# Altium PCB My_STM32_BOARD_PCB.PcbDoc
Units mil, origin at the board's own origin, x right, y up, seen from the top; angles counter-clockwise.
Board outline 4553.06 x 2760.98 mil, 2 copper layers (Top Layer, Bottom Layer); 71 components, 127 nets, 537 pads, 119 vias.
Unrouted connection lines stored in the file: 76.
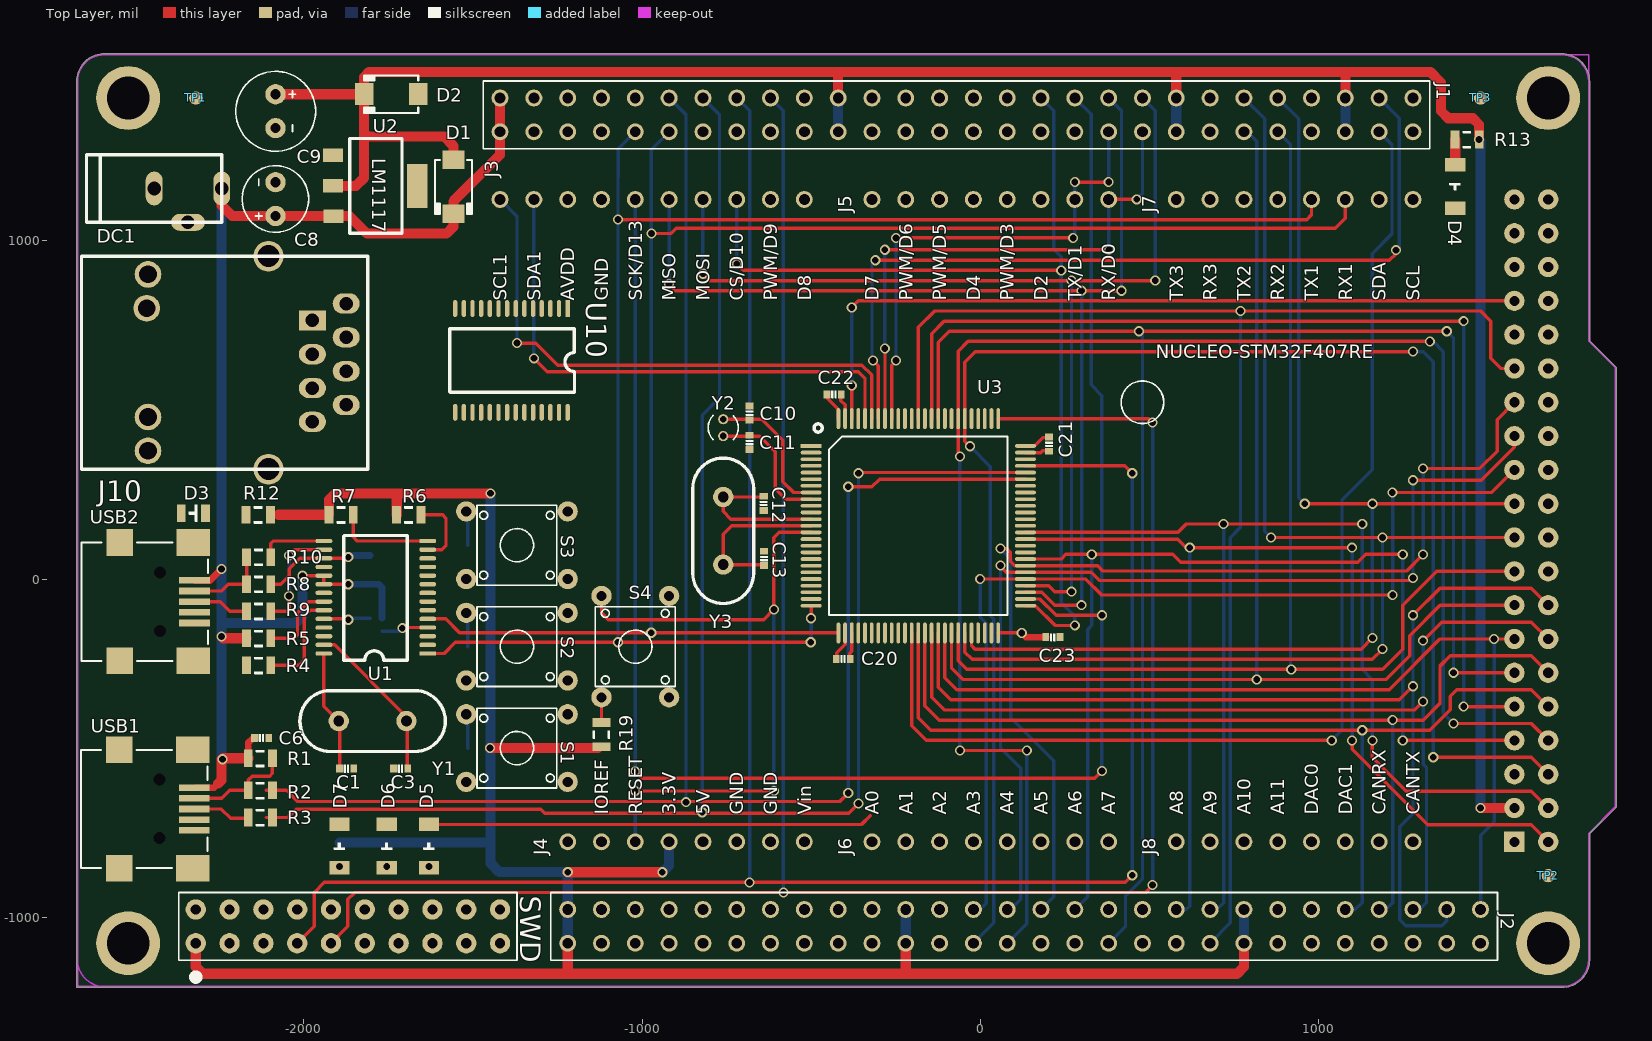
[diagram p0: Top Layer view]
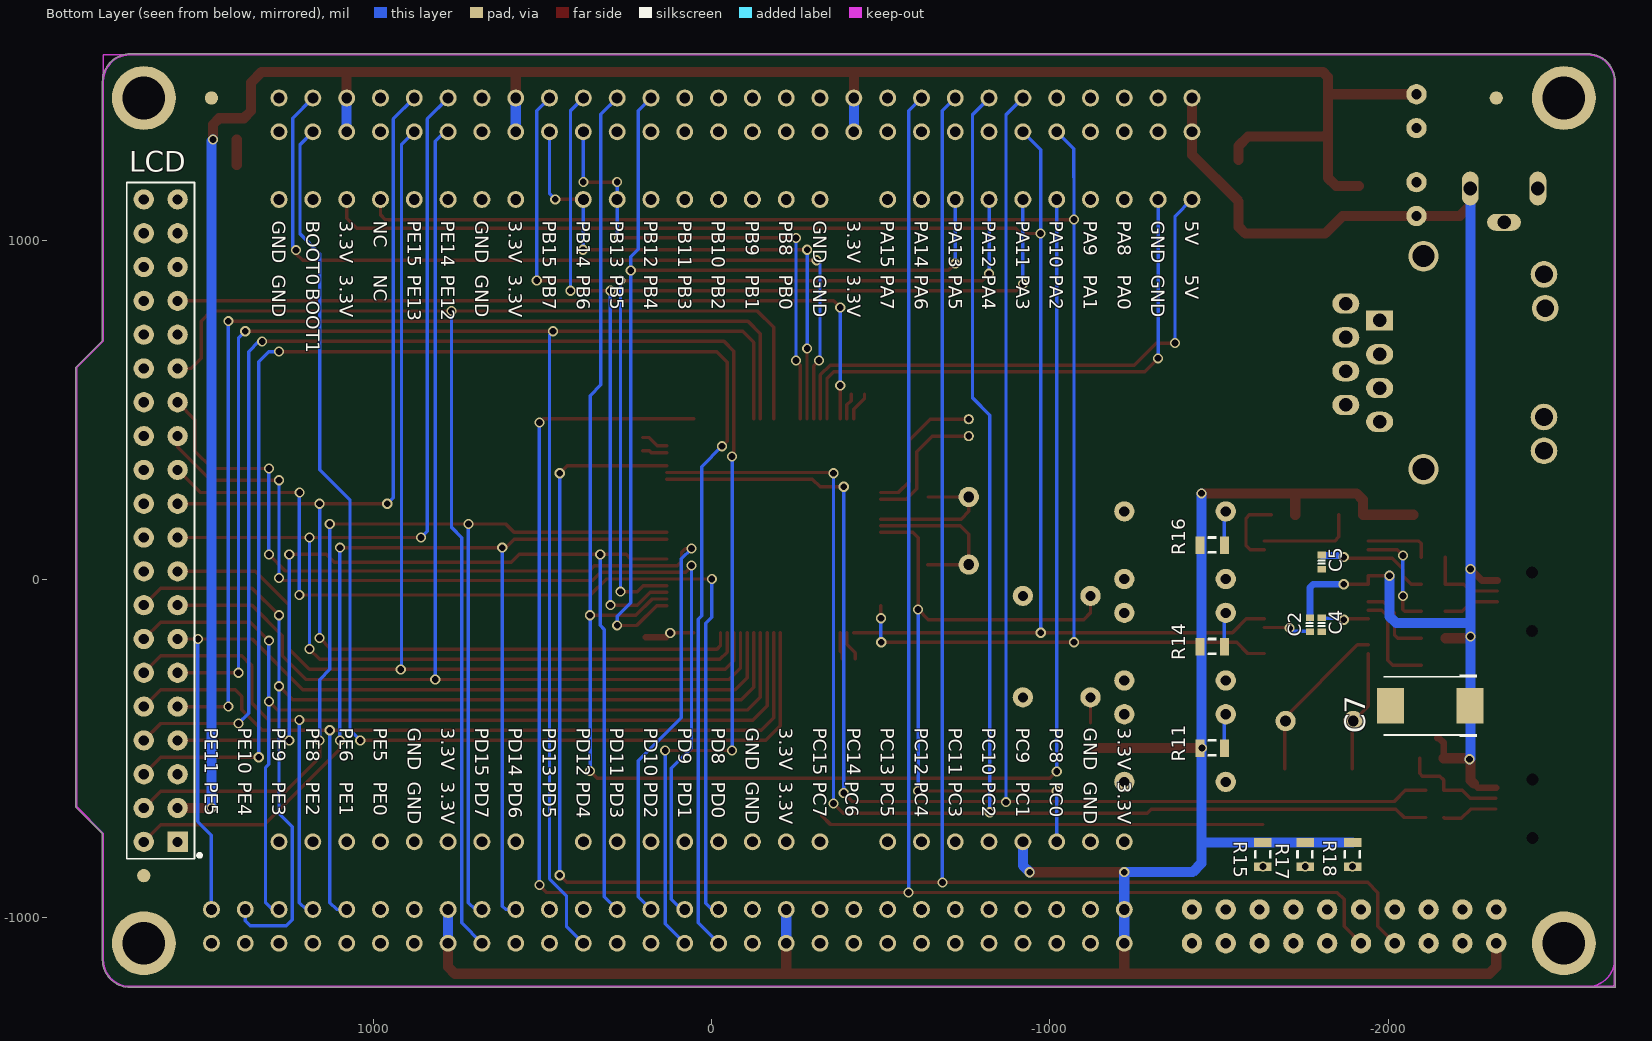
[diagram p1: Bottom Layer view, seen from below]
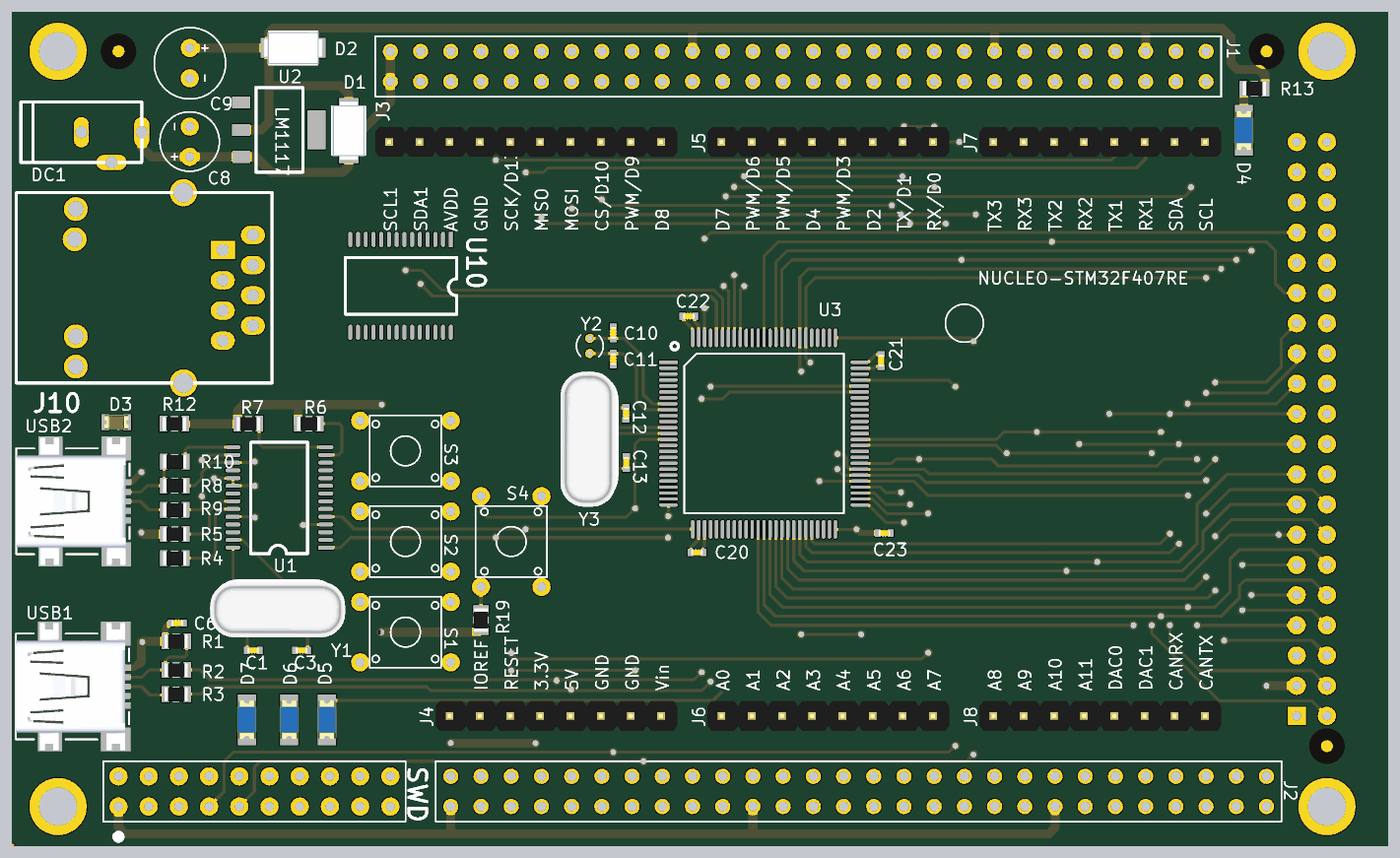
[diagram p2: 3D render of the assembled board from above, using the file's embedded part models]
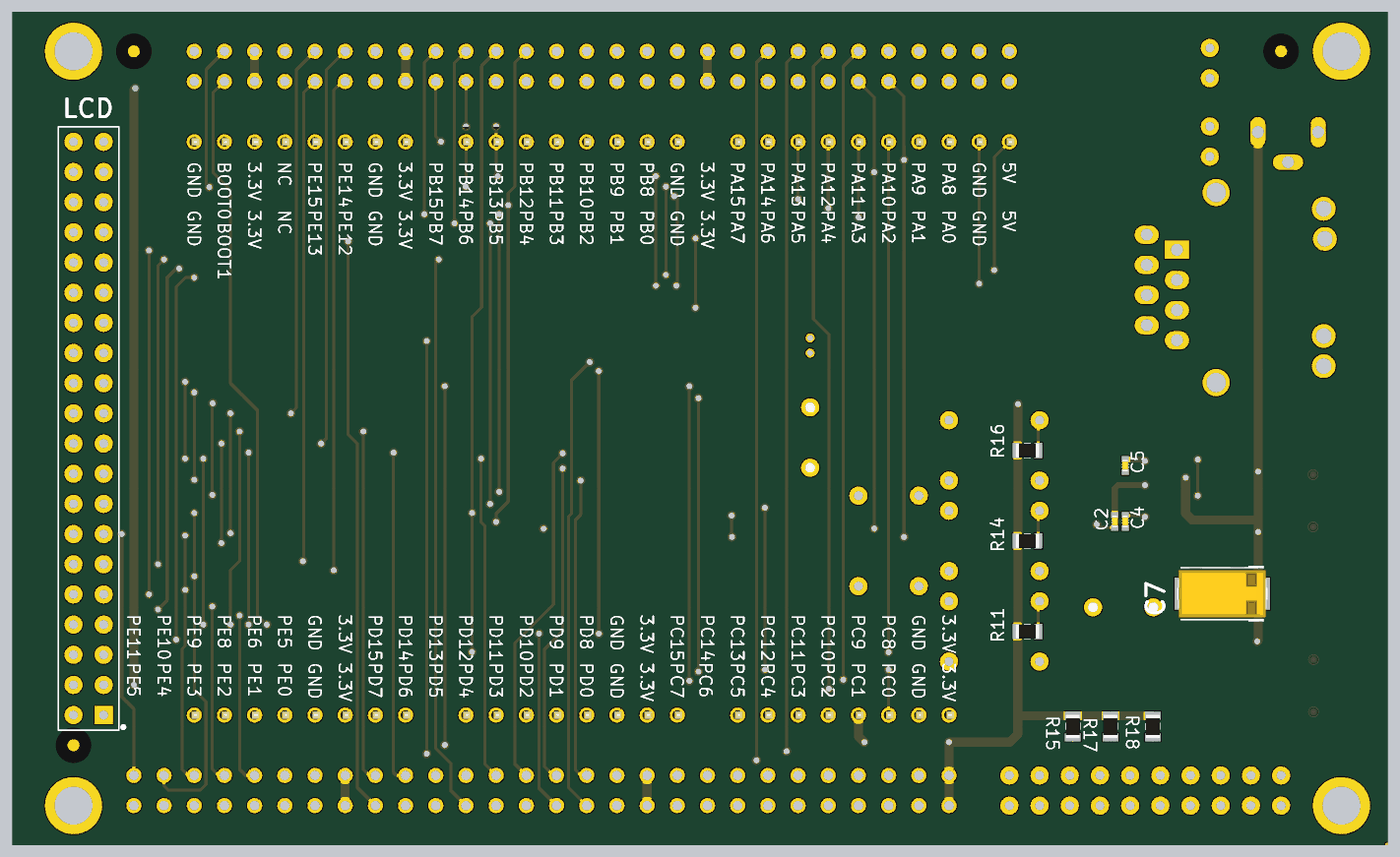
[diagram p3: 3D render of the assembled board from below, using the file's embedded part models]

## Layer stack, top to bottom
Top Layer: signal copper 1.4
Dielectric: dielectric 12.6, FR-4, Dk 4.8
Bottom Layer: signal copper 1.4

## Board outline
-2669.57,-1207.77 cw(c-2669.61,-1205.25) -2672.12,-1205.25 -2672.12,1471.91 cw(c-2590.87,1471.91) -2590.87,1553.17 cw(c-2590.87,1550.65) -2590.84,1553.17 -1665,1553.22 cw(c-1665,1550.7) -1664.52,1553.17 1720.94,1553.17 cw(c1720.94,1471.91) 1802.2,1471.91 cw(c1799.69,1471.91) 1802.2,1471.88 1802.2,705.24 1880.2,627.23 cw(c1878.43,625.46) 1880.94,625.46 1880.94,-673.76 cw(c1878.43,-673.76) 1880.2,-675.54 1802.2,-753.54 1802.2,-1126.51 cw(c1720.94,-1126.51) 1720.94,-1207.77 -2590.99,-1207.77 ccw(c-2590.87,-1126.51) -2590.87,-1207.77 ccw(c-2590.87,-1205.25)

## Design rules (kind name [scope] priority, off if disabled: settings)
Clearance [All] p1: gap=8
PolygonConnect [All] p1: connectstyle=Relief reliefconductorwidth=10 reliefentries=4 polygonreliefangle="90 Angle"
RoutingVias [All] p1: holewidth=28 width=50 viastyle="Through Hole" minholewidth=28 minwidth=50 maxholewidth=28 maxwidth=50
SilkscreenOverComponentPads [All] p1: minsilkscreentomaskgap=10
SolderMaskExpansion [All] p1: expansion=4
Width [All] p1: maxlimit=30 minlimit=10 preferedwidth=30 minimp=50.000000 maximp=50.000000 favimp=50.000000
27 further rules are at their usual default settings.

## Classes and differential pairs
component class U_My_STM32_BOARD_FUNCTION_SCH: * C1 C2 C3 C4 C5 C6 C7 C8 C9 COM? D1 D2 D3 D4 D5 D6 D7 DC1 J10 R1 R2 R3 R4 R5 R6 R7 R8 R9 R10 R11 R12 R13 R14 R15 R16 R17 R18 R19 S1 S2 S3 S4 TP1 TP2 TP3 U1 U2 U10 USB1 USB2 Y1
component class U_My_STM32_BOARD_ARDUINO_SCH: J3 J4 J5 J6 J7 J8
component class U_My_STM32_BOARD_MCU_SCH: C10 C11 C12 C13 C20 C21 C22 C23 U3 Y2 Y3
component class U_My_STM32_BOARD_HEADER_SCH: J1 J2 LCD SWD

## Components (designator, comment, footprint, x,y, rotation, side; value= is the part's Value field where it differs from the comment)
C1 "Cap_0402" CAP_0402 -1874,-560.3 r0 top
C2 "Cap_0402" CAP_0402 -1769,-135.3 r90 bottom
C3 "Cap_0402" CAP_0402 -1714,-560.3 r180 top
C4 "Cap_0402" CAP_0402 -1804,-135.3 r270 bottom
C5 "Cap_0402" CAP_0402 -1804,49.7 r270 bottom
C6 "Cap_0402" CAP_0402 -2125,-470 r180 top
C7 "Cap_Tan_2917" CAP_TAN_D2917 -2125,-375 r0 bottom
C8 "Cap_Pol" Cap_Pol_F5 -2084,1073.7 r90 top (schematic designator C12)
C9 "Cap_Pol" Cap_Pol_F6 -2084,1433.7 r270 top (schematic designator C11)
C10 "Cap_0402" CAP_0402 -682,491 r270 top
C11 "Cap_0402" CAP_0402 -682,404 r90 top
C12 "Cap_0402" CAP_0402 -640,224 r90 top
C13 "Cap_0402" CAP_0402 -639,61 r270 top
C20 "Cap_0402" CAP_0402 -405,-236 r0 top
C21 "Cap_0402" CAP_0402 204,399 r90 top
C22 "Cap_0402" CAP_0402 -432,546 r180 top
C23 "Cap_0402" CAP_0402 215,-172 r180 top
D1 "" DIODE_DO-214AC -1558,1160 r270 top
D2 "" DIODE_DO-214AC -1742,1434 r180 top
D3 "LED_0805" LED_0805_RED -2327,195 r180 top
D4 "LED_0805" LED_1206_BLUE 1405,1161 r270 top
D5 "LED_0805" LED_1206_BLUE -1630,-790 r90 top
D6 "LED_0805" LED_1206_BLUE -1755,-790 r90 top
D7 "LED_0805" LED_1206_BLUE -1895,-790 r90 top
DC1 "DC5.0V" DC_5V -2243,1155 r180 top
J1 "HDR2X28_2.54" HDR2X28_2.54 1280,1422.7 r270 top
J2 "HDR2X28_2.54" HDR2X28_2.54 1480,-977.3 r270 top
J3 "HDR1X10_2.54" HDR1X10_2.54_180 -1420,1122.7 r90 top
J4 "HDR1X8_2.54" HDR1X8_2.54_180 -1220,-777.3 r90 top (schematic designator J5)
J5 "HDR1X8_2.54" HDR1X8_2.54_180 -320,1122.7 r90 top (schematic designator J6)
J6 "HDR1X8_2.54" HDR1X8_2.54_180 -320,-777.3 r90 top (schematic designator J4)
J7 "HDR1X8_2.54" HDR1X8_2.54_180 580,1122.7 r90 top
J8 "HDR1X8_2.54" HDR1X8_2.54_180 580,-777.3 r90 top
J10 "HR9111105A" RJ45-HR9111105A -2225,640 r180 top
LCD "LCD_ILI9325" ILI9325 1580,-777.3 r90 bottom
R1 "Res_0805" RES_0805 -2129,-530.3 r180 top
R2 "Res_0805" RES_0805 -2129,-625.3 r0 top
R3 "Res_0805" RES_0805 -2129,-705.3 r0 top
R4 "Res_0805" RES_0805 -2134,-255.3 r180 top
R5 "Res_0805" RES_0805 -2134,-175.3 r180 top
R6 "Res_0805" RES_0805 -1690,190 r0 top
R7 "Res_0805" RES_0805 -1890,190 r0 top
R8 "Res_0805" RES_0805 -2134,-15.3 r180 top
R9 "Res_0805" RES_0805 -2134,-95.3 r180 top
R10 "Res_0805" RES_0805 -2134,64.7 r180 top
R11 "Res_0805" RES_0805 -1480,-500 r180 bottom
R12 "Res_0805" RES_0805 -2135,190 r180 top
R13 "Res_0805" RES_0805 1440,1300 r180 top
R14 "Res_0805" RES_0805 -1480,-200 r180 bottom
R15 "Res_0805" RES_0805 -1630,-815 r270 bottom
R16 "Res_0805" RES_0805 -1480,100 r180 bottom
R17 "Res_0805" RES_0805 -1755,-815 r270 bottom
R18 "Res_0805" RES_0805 -1895,-815 r270 bottom
R19 "Res_0805" RES_0805 -1120,-460 r90 top
S1 "Button" My_Button -1370,-500 r0 top
S2 "Button" My_Button -1370,-200 r0 top (schematic designator S3)
S3 "Button" My_Button -1370,100 r0 top (schematic designator S4)
S4 "Button" My_Button -1020,-200 r90 top (schematic designator S2)
SWD "PH_CN20" CN20 -2320,-1077.3 r90 top
TP1 "TP" MARK -2320,1422.7 r0 top
TP2 "TP" MARK 1680,-877.3 r0 top
TP3 "TP" MARK 1480,1422.7 r0 top
U1 "Com_PL2303" SSOP-28 -1634,-220.3 r180 top
U2 "LM317" lm1117 -1790,1173 r270 top
U3 "STM32FXXXV" LQFP-100 -170,152.7 r0 top
U10 "NET-ENC28J60" SSOP-28 -1220,800 r270 top
USB1 "USB_Mini" USB_MINI-B -2325,-680 r90 top
USB2 "USB_Mini" USB_MINI-B -2323.61,-67.03 r90 top
Y1 "XTAL" XT_HC49S_D -1797,-420 r180 top
Y2 "XTAL" XT_XTAL_32K -760,422.7 r90 top
Y3 "XTAL" XT_HC49S_D -760,142.7 r90 top

## Footprints (in the part's own frame and the unit in brackets; to place one, negate y for a bottom-side part, rotate by r counter-clockwise, add the part's x,y. Pads: shape width x height; smd on the part's side, far side on the other; paste and mask are expansions set on the pad)
CAP_0402 [mil]
  rect 20x24 smd: 1(-21,0) 2(21,0)
  silkscreen extent -6,-10 6,10, body extent -20,-10 20,10, height 22
Cap_Pol_F5 [mil] "Cap F5"
  round 60 hole 30: 1(0,0) 2(100,0)
  silkscreen extent -48,-98 149,99
Cap_Pol_F6 [mil] "Cap F5"
  round 60 hole 30: 1(0,0) 2(100,0)
  silkscreen extent -68,-118 168,119
CAP_TAN_D2917 [mil]
  rect 80x106 smd: 1(-118,0) 2(118,0)
  silkscreen extent -138,-92 138,92, body extent -150,-78 150,78, height 122
CN20 [mil] "Header 10 X 2"
  round 60 hole 30: 1(0,0) 2(100,0) 3(0,-100) 4(100,-100) 5(0,-200) 6(100,-200) 7(0,-300) 8(100,-300) 9(0,-400) 10(100,-400) 11(0,-500) 12(100,-500) 13(0,-600) 14(100,-600) 15(0,-700) 16(100,-700) 17(0,-800) 18(100,-800) 19(0,-900) 20(100,-900)
  silkscreen extent -110,-950 150,50
DC_5V [mil] "DC 5.0V"
  oval 50x100 hole 40: 1(0,0) 2(200,0)
  oval 100x50 hole 40: 3(100,100)
  silkscreen extent 0,-100 400,100
DIODE_DO-214AC [mil] "SMA"
  rect 55x65 smd: 1(-80,0) 2(80,0)
  silkscreen extent -80,-55 80,55, body extent -98,-53 98,53, height 85
HDR1X8_2.54_180 [mil]
  round 50 hole 32: 1(0,0) 2(0,-100) 3(0,-200) 4(0,-300) 5(0,-400) 6(0,-500) 7(0,-600) 8(0,-700)
  body extent -49,-750 49,50, height 323
HDR1X10_2.54_180 [mil]
  round 50 hole 32: 1(0,0) 2(0,-100) 3(0,-200) 4(0,-300) 5(0,-400) 6(0,-500) 7(0,-600) 8(0,-700) 9(0,-800) 10(0,-900)
  body extent -49,-950 49,50, height 323
HDR2X28_2.54 [mil]
  round 50 hole 32: 1(0,0) 2(100,0) 3(0,-100) 4(100,-100) 5(0,-200) 6(100,-200) 7(0,-300) 8(100,-300) 9(0,-400) 10(100,-400) 11(0,-500) 12(100,-500) 13(0,-600) 14(100,-600) 15(0,-700) 16(100,-700) 17(0,-800) 18(100,-800) 19(0,-900) 20(100,-900) 21(0,-1000) 22(100,-1000) 23(0,-1100) 24(100,-1100) 25(0,-1200) 26(100,-1200) 27(0,-1300) 28(100,-1300) 29(0,-1400) 30(100,-1400) 31(0,-1500) 32(100,-1500) 33(0,-1600) 34(100,-1600) 35(0,-1700) 36(100,-1700) 37(0,-1800) 38(100,-1800) 39(0,-1900) 40(100,-1900) 41(0,-2000) 42(100,-2000) 43(0,-2100) 44(100,-2100) 45(0,-2200) 46(100,-2200) 47(0,-2300) 48(100,-2300) 49(0,-2400) 50(100,-2400) 51(0,-2500) 52(100,-2500) 53(0,-2600) 54(100,-2600) 55(0,-2700) 56(100,-2700)
  silkscreen extent -50,-2750 150,50
ILI9325 [mil] "My  ILI9325 LCD module"
  rect 60x60 hole 30: 1(0,0)
  round 60 hole 30: 2(100,0) 3(200,0) 4(300,0) 5(400,0) 6(500,0) 7(600,0) 8(700,0) 9(800,0) 10(900,0) 11(1000,0) 12(1100,0) 13(1200,0) 14(1300,0) 15(1400,0) 16(1500,0) 17(1600,0) 18(1700,0) 19(1800,0) 20(1900,0) 21(0,100) 22(100,100) 23(200,100) 24(300,100) 25(400,100) 26(500,100) 27(600,100) 28(700,100) 29(800,100) 30(900,100) 31(1000,100) 32(1100,100) 33(1200,100) 34(1300,100) 35(1400,100) 36(1500,100) 37(1600,100) 38(1700,100) 39(1800,100) 40(1900,100)
  silkscreen extent -50,-70 1950,150
LED_0805_RED [mil]
  rect 26x52 smd: 1(-36,0) 2(36,0)
  silkscreen extent -12,-24 12,24, body extent -40,-25 40,25, height 43
LED_1206_BLUE [mil]
  rect 40x60 smd: 1(-64,0) 2(64,0)
  silkscreen extent -10,-16 10,16, body extent -63,-31 63,31, height 43
lm1117 [mm]
  rect 1x1.5 smd: 1(-2.043,-3.148) 2(0.256,-3.148) 3(2.53,-3.123)
  rect 3.3x1.549 smd: 4(0.254,3.175)
  silkscreen extent -3.3,-1.91 3.81,2.03
LQFP-100 [mil]
  rect 62x11.02 smd: 1(-330,241)
  oval 62x11.02 smd: 2(-330,221.32) 3(-330,201.63) 4(-330,181.95) 5(-330,162.26) 6(-330,142.57) 7(-330,122.89) 8(-330,103.2) 9(-330,83.52) 10(-330,63.84) 11(-330,44.15) 12(-330,24.47) 13(-330,4.78) 14(-330,-14.91) 15(-330,-34.59) 16(-330,-54.28) 17(-330,-73.96) 18(-330,-93.64) 19(-330,-113.33) 20(-330,-133.01) 21(-330,-152.7) 22(-330,-172.39) 23(-330,-192.07) 24(-330,-211.76) 25(-330,-231.44) 51(303.87,-231.44) 52(303.87,-211.76) 53(303.87,-192.07) 54(303.87,-172.39) 55(303.87,-152.7) 56(303.87,-133.01) 57(303.87,-113.33) 58(303.87,-93.64) 59(303.87,-73.96) 60(303.87,-54.28) 61(303.87,-34.59) 62(303.87,-14.91) 63(303.87,4.78) 64(303.87,24.47) 65(303.87,44.15) 66(303.87,63.84) 67(303.87,83.52) 68(303.87,103.2) 69(303.87,122.89) 70(303.87,142.57) 71(303.87,162.26) 72(303.87,181.95) 73(303.87,201.63) 74(303.87,221.32) 75(303.87,241)
  oval 11.02x62 smd: 26(-249.28,-312.16) 27(-229.6,-312.16) 28(-209.91,-312.16) 29(-190.23,-312.16) 30(-170.54,-312.16) 31(-150.86,-312.16) 32(-131.17,-312.16) 33(-111.49,-312.16) 34(-91.8,-312.16) 35(-72.12,-312.16) 36(-52.43,-312.16) 37(-32.75,-312.16) 38(-13.06,-312.16) 39(6.62,-312.16) 40(26.31,-312.16) 41(45.99,-312.16) 42(65.68,-312.16) 43(85.36,-312.16) 44(105.05,-312.16) 45(124.73,-312.16) 46(144.42,-312.16) 47(164.1,-312.16) 48(183.79,-312.16) 49(203.47,-312.16) 50(223.16,-312.16) 76(223.16,321.72) 77(203.47,321.72) 78(183.79,321.72) 79(164.1,321.72) 80(144.42,321.72) 81(124.73,321.72) 82(105.05,321.72) 83(85.36,321.72) 84(65.68,321.72) 85(45.99,321.72) 86(26.31,321.72) 87(6.62,321.72) 88(-13.06,321.72) 89(-32.75,321.72) 90(-52.43,321.72) 91(-72.12,321.72) 92(-91.8,321.72) 93(-111.49,321.72) 94(-131.17,321.72) 95(-150.86,321.72) 96(-170.54,321.72) 97(-190.23,321.72) 98(-209.91,321.72) 99(-229.6,321.72) 100(-249.28,321.72)
  silkscreen extent -321,-259 251,306
MARK [mm]
  round 1 all layers, no hole mask+1: 1(0,0)
My_Button [mil]
  round 60 hole 30: 1(-150,100) 2(150,100) 3(-150,-100) 4(150,-100)
  silkscreen extent -118,-118 118,118
RES_0805 [mil]
  rect 26x52 smd: 1(-36,0) 2(36,0)
  silkscreen extent -12,-24 12,24, body extent -39,-24 39,24, height 24
RJ45-HR9111105A [mil] "Íø¿Ú²"
  oval 80x60 hole 40: 1(-250,175.2) 2(-350,125.2) 3(-250,75.2) 4(-350,25.2) 5(-250,-24.8) 6(-350,-74.8) 8(-350,-174.8)
  rect 80x60 hole 40: 7(-250,-124.8)
  round 78.74 hole 51.97: 9(236.22,-260.83) 10(240,-160.83) 11(236.22,160.83) 12(236.22,260.83)
  round 90 hole 65: 13(-120.08,315.16) 14(-120.08,-314.76)
  silkscreen extent -413,-315 433,315
SSOP-28 [mm]
  rect 1.27x0.33 smd: 1(0,0)
  oval 1.27x0.33 smd: 2(0,-0.65) 3(0,-1.3) 4(0,-1.95) 5(0,-2.6) 6(0,-3.25) 7(0,-3.9) 8(0,-4.55) 9(0,-5.2) 10(0,-5.85) 11(0,-6.5) 12(0,-7.15) 13(0,-7.8) 14(0,-8.45) 15(7.8,-8.45) 16(7.8,-7.8) 17(7.8,-7.15) 18(7.8,-6.5) 19(7.8,-5.85) 20(7.8,-5.2) 21(7.8,-4.55) 22(7.8,-3.9) 23(7.8,-3.25) 24(7.8,-2.6) 25(7.8,-1.95) 26(7.8,-1.3) 27(7.8,-0.65) 28(7.8,0)
  silkscreen extent 1.52,-8.86 6.3,0.51
USB_MINI-B [mm]
  rect 0.5x2.3 smd mask+0.025: 1(1.6,0) 2(0.8,0) 3(0,0) 4(-0.8,0) 5(-1.6,0)
  rect 2x2.5 smd mask+0: 5(-4.45,0.1) 5(4.45,0.1)
  rect 2x2 smd mask+0: 5(-4.45,5.631) 5(4.45,5.631)
  round 0.6 hole 0.9 unplated: 5(-2.2,2.6) 5(2.2,2.6)
  silkscreen extent -4.45,-1.02 4.44,8.51, body extent -5.35,-0.7 5.35,8.5, height 3.95
XT_HC49S_D [mil]
  round 60 hole 32: 1(-100,0) 2(100,0)
  silkscreen extent -215,-90 215,90, body extent -227,-86 219,97, height 138
XT_XTAL_32K [mil] "XTAL_32K"
  round 30 hole 20: 1(0,0) 2(50,0)
  silkscreen extent -11,-45 61,45

## Part data
C1 C2 C3 C4 C5 C6 C7 C8 C9 C10 C11 C12 C13 C20 C21 C22 C23: "Capacitor"
D1 D2: library part Diode_SMA, "Diode"
D3 D4 D5 D6 D7: "LED"
DC1: library part DC5V
J10: library part RJ45-HR9111105A
LCD: "LCD ILI9325"
R1 R2 R3 R4 R5 R6 R7 R8 R9 R10 R11 R12 R13 R14 R15 R16 R17 R18 R19: "Resistor"
S1 S2 S3 S4: library part KEY, "ËÄ½Å°"
SWD: "10 X 2"
U1: "PL2303"
U2: library part Power, "LM317 µçÔ´Ð"
USB1 USB2: "USB"

## Free pads (board coordinates)
  round 10 hole 5: 0(-2669.61,-1205.25)
  round 188.98 hole 125.98: 0(1680,-1077.3) 1(1680,1422.7) 2(-2520,1422.7) 3(-2520,-1077.3)

## Via types
v1: diameter 30, hole 20, Top Layer to Bottom Layer, tented both sides, 119 vias

## Nets (pads, with @x,y where several pads share a name; then routed paths per layer and width w, separated by ;. In a path a pad name is that pad's centre, name@x,y a point inside that pad or via, vN(x,y) a via of type N, cw(c..) or ccw(c..) an arc to the next point about the centre after c; other vN are vias at no path point)
A_AREF: J3.3
A_CLK: J1.21 J3.5 U3.52 | length 5360
  Top Layer w10: v1(-1020,-569) -1000,-589 339,-589 v1(360,-568) v1@361,-567 ; U3.52 176.3,-59.06 224.54,-107.3 v1(360,-107.3)
  Bottom Layer w10: v1(-1020,-569) J3.5 ; J1.21 328,1374.7 328,574.7 360,542.7 v1(360,-107.3) v1(360,-568)
A_CS: J1.23 J3.8 U3.51 | length 2929.9
  Top Layer w10: v1(-720,932.7) -700,912.7 v1(240,912.7) ; U3.51 162.74,-78.74 221.3,-137.3 279.7,-137.3 v1(280,-137)
  Bottom Layer w10: v1(-720,932.7) J3.8 ; J1.23 218,1384.7 218,974.7 240,952.7 v1(240,912.7) 240,-70 280,-110 v1(280,-137)
A_D8: J3.10
A_MISO: J1.19 J3.6 U3.53 | length 3293.9
  Top Layer w10: v1(-920,872.7) -900,852.7 v1(300,852.7) v1(418,852.7) ; U3.53 182.07,-39.37 220,-77.3 v1(300,-77.3)
  Bottom Layer w10: v1(-920,872.7) J3.6 ; v1(300,-77.3) v1(300,852.7) ; J1.19 418,1384.7 v1(418,852.7)
A_MOSI: J1.17 J3.7 U3.54 | length 3205.4
  Top Layer w10: v1(-820,902.7) -800,882.7 v1(270,882.7) v1(518,882.7) ; U3.54 202.39,-19.69 220,-37.3 v1(270,-37.3)
  Bottom Layer w10: J3.7@-840,1122.7 J3.7 v1(-820,902.7) ; v1(270,-37.3) v1(270,882.7) ; J1.17 518,1384.7 v1(518,882.7)
A_PWM/D9: J3.9
A_SCL1: J3.1 U3.95 | length 1663
  Top Layer w10: v1(-1370,697.7) -1315,697.7 -1250,632.7 -350,632.7 -320.86,603.56 U3.95
  Bottom Layer w10: J3.1 -1370,1072.7 v1(-1370,697.7)
A_SDA1: J3.2 U3.96 | length 1592.3
  Top Layer w10: v1(-1320,652.7) -1280,612.7 -361.09,612.7 -340.54,592.16 U3.96
  Bottom Layer w10: v1(-1320,652.7) J3.2
AGND: C1.2 C3.2 C4.2 C5.2 C6.1 C7.2 C8.2 C9.2 C10.1 C11.1 C12.1 C13.1 C20.1 C21.1 C22.1 C23.1 D2.1 D3.2 DC1.3 J1.1 J1.2 J1.13 J1.14 J1.33 J1.34 J1.53 J1.54 J2.13 J2.14 J2.33 J2.34 J2.53 J2.54 J3.4 J4.6 J4.7 LCD.1 R4.2 S1.3 S2.3 S3.3 S4.3 SWD.4 U1.7 U1.18 U1.21 U1.25 U1.26 U2.1 U3.27 U3.49 U3.74 U3.99 USB1.5 USB2.5 | length 236.1
  Top Layer w10: C20.1@-424.68,-236 -424.68,-218.69 -399.6,-193.6 U3.27 ; C22.1@-412.32,546 -412.32,527.68 -399.6,514.97 U3.99 ; U3.74 179.01,374.01 184.32,379.31 C21.1@204,379.31
BOOT0: J1.3 U3.94 | length 2517.5
  Top Layer w10: v1(-317,646) -301.17,630.17 U3.94 ; v1(-310,942.7) 1210,942.7 1230,962.7 v1(1230,972.7)
  Bottom Layer w10: v1(-317,646) -320,649 -320,932.7 v1(-310,942.7) ; J1.3 1240,1362.7 1240,982.7 v1(1230,972.7)
BOOT1: J1.4 U3.37 | length 3425
  Top Layer w10: U3.37 -202.75,-434.55 -160,-477.3 v1(1040,-477.3)
  Bottom Layer w10: v1(1040,-477.3) 1070,-447.3 1070,232.7 1160,322.7 1160,962.7 1218,1020.7 1218,1284.7 J1.4
KEY1: S1.2
KEY2: S2.2
KEY3: S3.2
LCD_CS: J2.18 LCD.15 U3.88 | length 4095.3
  Top Layer w10: U3.88 -183.06,744.64 -135,792.7 v1(770,792.7) 1480,792.7 1510,762.7 1510,652.7 1540,622.7 LCD.15
  Bottom Layer w10: J2.18 740,-1017.3 740,122.7 770,152.7 v1(770,792.7)
LCD_DB0: J2.19 LCD.21 U3.61 | length 3370.7
  Top Layer w10: U3.61 584.59,118.11 610,92.7 v1(1100,92.7) ; v1(1100,-477.3) 1100,-504 1323.3,-727.3 1630,-727.3 LCD.21
  Bottom Layer w10: J2.19 610,-977.3 620,-967.3 v1(620,92.7) ; v1@1100,-467.3 v1@1100,102.7
LCD_DB1: J2.17 LCD.22 U3.62 | length 3459.3
  Top Layer w10: U3.62 585.1,137.79 610,162.7 v1(720,162.7) v1(1130,162.7) ; v1(1160,-477.3) 1160,-527.3 1260,-627.3 1630,-627.3 LCD.22
  Bottom Layer w10: J2.17 700,-977.3 720,-957.3 v1(720,162.7) ; v1(1130,162.7) 1130,-267.3 1160,-297.3 v1(1160,-477.3)
LCD_DB2: J2.32 LCD.23 U3.81 | length 4710.3
  Top Layer w10: v1(-30,392.7) -45.27,407.97 U3.81 -45.27,641.43 -14,672.7 v1(1280,672.7) ; v1(1340,-527.3) 1630,-527.3 LCD.23
  Bottom Layer w10: v1(-30,392.7) 30,332.7 30,-109 40,-119 40,-1017.3 J2.32 ; v1@1290,672.7 1310,672.7 1340,642.7 v1(1340,-527.3)
LCD_DB3: J2.30 LCD.24 U3.82 | length 4845.6
  Top Layer w10: v1@-64.95,362.7 U3.82 -64.95,673.75 -36,702.7 v1(1330,702.7) ; v1(-60,-507.3) v1(138,-507.3) ; v1(1400,-427.3) 1630,-427.3 LCD.24
  Bottom Layer w10: v1(-60,-507.3) v1(-60,362.7) ; J2.30 138,-1019.3 v1(138,-507.3) ; v1(1330,702.7) 1340,702.7 1370,672.7 1370,-397.3 v1(1400,-427.3)
LCD_DB4: J2.9 LCD.25 U3.38 | length 2791.2
  Top Layer w10: U3.38 -183.06,-409.94 -145.7,-447.3 1330,-447.3 1390,-387.3 1390,-347.3 1410,-327.3 1630,-327.3 LCD.25
  Bottom Layer w10: J2.9 1110,-977.3 1130,-957.3 v1(1130,-447.3)
LCD_DB5: J2.7 LCD.26 U3.39 | length 2828.4
  Top Layer w10: U3.39 -163.38,-374.62 -120.7,-417.3 1310,-417.3 1360,-367.3 1360,-257.3 1390,-227.3 1630,-227.3 LCD.26
  Bottom Layer w10: J2.7 1200,-977.3 1220,-957.3 v1(1220,-417.3)
LCD_DB6: J2.5 LCD.27 U3.40 | length 2911.1
  Top Layer w10: U3.40 -143.69,-350.31 -106.7,-387.3 1285,-387.3 v1(1310,-362.3) ; v1(1310,-182.3) 1365,-127.3 1630,-127.3 LCD.27
  Bottom Layer w10: J2.5 1300,-977.3 1320,-957.3 1320,-557.3 1310,-547.3 v1(1310,-362.3) v1(1310,-182.3)
LCD_DB7: J2.3 LCD.28 U3.41 | length 3156.5
  Top Layer w10: U3.41 -124.01,-319.99 -86.7,-357.3 1240,-357.3 v1(1280,-317.3) ; v1(1280,-107.3) 1360,-27.3 1630,-27.3 LCD.28
  Bottom Layer w10: v1(1280,-107.3) v1(1280,-317.3) ; v1@1282,-319.3 v1(1280,-317.3) ; J2.3 1380,-1011 1365,-1026 1259,-1026 1241,-1008 1241,-733 1280,-694 1280,-557.3 v1(1280,-317.3)
LCD_DB8: J2.1 LCD.7 U3.42 | length 2710
  Top Layer w10: U3.42 -104.32,-291.68 -68.7,-327.3 1210,-327.3 1360,-177.3 LCD.7
  Bottom Layer w10: J2.1 1480,-757.3 1520,-717.3 v1(1520,-177.3)
LCD_DB9: J1.12 LCD.8 U3.43 | length 3550.5
  Top Layer w10: U3.43 -84.64,-263.36 -50.7,-297.3 1200,-297.3 1270,-227.3 1270,-167.3 1360,-77.3 LCD.8
  Bottom Layer w10: J1.12 790,1312.7 800,1312.7 818,1294.7 v1(818,-297.3)
LCD_DB10: J1.10 LCD.9 U3.44 | length 3538
  Top Layer w10: U3.44 -64.95,-242 -39.65,-267.3 v1(920,-267.3) 1190,-267.3 1250,-207.3 1250,-77.3 1350,22.7 LCD.9
  Bottom Layer w10: J1.10 918,1284.7 v1@918,-265.3
LCD_DB11: J1.11 LCD.10 U3.45 | length 3696.2
  Top Layer w10: U3.45 -45.27,-216 -23.97,-237.3 1160,-237.3 v1(1190,-207.3) ; v1(860,122.7) v1(1190,122.7) LCD.10
  Bottom Layer w10: J1.11 842,1360.7 842,140.7 v1(860,122.7) ; v1(1190,-207.3) v1(1190,122.7)
LCD_DB12: J1.9 LCD.11 U3.46 | length 3485.2
  Top Layer w10: U3.46 -25.58,-197.05 -15.33,-207.3 1127,-207.3 v1(1160,-174.3) ; v1(960,222.7) v1(1160,222.7) LCD.11
  Bottom Layer w10: J1.9 942,1360.7 942,240.7 v1(960,222.7) ; v1(1160,-174.3) v1@1160,216.7
LCD_DB13: J2.31 LCD.12 U3.55 | length 2942.7
  Top Layer w10: v1(0,0) U3.55 312.7,0 360,-47.3 v1(1220,-47.3) ; v1(1219,256) 1513.3,256 LCD.12
  Bottom Layer w10: J2.31 0,-977.3 18,-959.3 18,-131 0,-113 v1(0,0) ; v1(1220,-47.3) v1@1220,255
LCD_DB14: J2.29 LCD.13 U3.56 | length 2963.4
  Top Layer w10: v1@64,32.7 77.01,19.68 U3.56 328.01,19.68 352,-4.3 1273,-4.3 v1(1280,2.7) ; v1(1280,292) 1482,292 1580,390 LCD.13
  Bottom Layer w10: v1(60,40) 60,-499 120,-559 120,-947.3 90,-977.3 J2.29 ; v1@1280,0.7 v1(1280,2.7) v1(1280,292)
LCD_DB15: J2.27 LCD.14 U3.57 | length 3122.2
  Top Layer w10: v1(60,90) 78,90 89.87,78.13 89.87,51.39 101.89,39.37 U3.57 347.33,39.37 363,23.7 1261,23.7 v1(1310,72.7) ; v1(1310,327) 1478,327 1529,378 1529,471.7 LCD.14
  Bottom Layer w10: v1(60,90) 90,60 90,-410 218,-538 218,-939.3 J2.27 ; v1(1310,72.7) v1(1310,327)
LCD_RD: J2.24 LCD.6 U3.85 | length 4796.8
  Top Layer w10: U3.85 -124.01,699.69 -91,732.7 v1(1380,732.7) ; v1(1400,-277.3) LCD.6
  Bottom Layer w10: J2.24 430,-1027.3 430,-937.3 480,-887.3 480,722.7 v1(470,732.7) ; v1(1380,732.7) 1400,712.7 v1(1400,-277.3)
LCD_RS: J2.25 LCD.4 U3.58 | length 3091.5
  Top Layer w10: U3.58 240,59.05 253.64,72.7 v1(330,72.7) 570,72.7 593,49.7 1117,49.7 1140,72.7 v1(1250,72.7) ; v1(1250,-477.3) LCD.4
  Bottom Layer w10: J2.25 318,-939.3 318,-149.3 330,-137.3 v1(330,72.7) ; v1(1250,-477.3) v1(1250,72.7)
LCD_RST: LCD.17 U3.98 | length 2296.6
  Top Layer w10: v1(-380,572.7) -379.91,572.61 U3.98 ; v1(-380,802.7) -360,822.7 LCD.17
  Bottom Layer w10: v1(-380,572.7) v1(-380,802.7)
LCD_WR: LCD.5 U3.86 | length 3130.5
  Top Layer w10: U3.86 -143.69,726.01 -107,762.7 v1(1430,762.7) ; v1(1430,-377.3) LCD.5
  Bottom Layer w10: v1(1430,-377.3) v1(1430,762.7)
LED1: D4.2
LED2: D5.2 U3.31 | length 1315.8
  Top Layer w10: D5.2 -351,-726 -325,-700
LED3: D6.2 U3.30
LED4: D7.2 U3.29
NetC1_1: C1.1 U1.28 Y1.2 | length 359.8
  Top Layer w10: U1.28 -1941.09,-375.73 -1894.28,-422.54 -1894,-422.82 C1.1@-1894,-560.62
NetC2_2: C2.2 U1.4
NetC3_1: C3.1 U1.27 Y1.1 | length 486.9
  Top Layer w10: U1.27 -1909.59,-194.71 -1694,-410.3 -1694,-422.27 -1694.28,-422.54 -1694,-422.82 C3.1@-1694,-560.62
NetC4_1: C4.1 U1.24 | length 140
  Top Layer w10: U1.24 -1871.36,-117.94 v1(-1869,-120.3)
  Bottom Layer w10: v1(-1869,-120.3) -1864.31,-115.62 C4.1@-1804,-115.62
NetC5_1: C5.1 R8.1 U1.17 | length 341.4
  Top Layer w10: R8.1@-2098.57,-15.3 -2069,-15.3 -2044,9.7 -2044,29.7 -2012.5,61.2 U1.17 -1872.5,61.2 v1(-1869,64.7)
  Bottom Layer w20: v1(-1869,64.7) -1864.31,69.38 C5.1@-1804,69.38
NetC10_2: C10.2 U3.8 Y2.2 | length 421.9
  Top Layer w10: Y2.2 -645.7,472.7 -583.5,410.5 -583.5,287.5 -551.91,255.9 U3.8
NetC11_2: C11.2 U3.9 Y2.1 | length 401.7
  Top Layer w10: Y2.1 -651.7,422.7 -606,377 -606,267 -575.22,236.22 U3.9
NetC12_2: C12.2 U3.12 Y3.2 | length 442.2
  Top Layer w10: Y3.2 C12.2@-640,242.7 ; Y3.2@-760,252.7 -760,200 -737.16,177.16 U3.12
NetC13_2: C13.2 U3.13 Y3.1 | length 470.9
  Top Layer w10: Y3.1 C13.2@-639,42.7 ; Y3.1@-760,52.7 -760,132 -734.52,157.48 U3.13
NetD3_1: D3.1 R12.2
NetD4_1: D4.1 R13.2 | length 75.2
  Top Layer w30: R13.2@1404.57,1300 1405,1299.57 D4.1
NetD5_1: D5.1 R15.2
  other v1: -1630,-850.43
NetD6_1: D6.1 R17.2
  other v1: -1755,-850.43
NetD7_1: D7.1 R18.2
  other v1: -1895,-850.43
NetR1_1: R1.1 R2.1 USB1.2 | length 318.7
  Top Layer w10: USB1.2@-2319,-648.8 -2242.5,-648.8 -2219,-625.3 -2164.43,-625.3 -2164.43,-594.43 -2152.8,-582.8 -2101.5,-582.8 -2093.57,-574.87 R1.1@-2093.57,-530.3
NetR3_1: R3.1 USB1.3 | length 167
  Top Layer w10: USB1.3@-2319,-680.3 -2244,-680.3 -2216.5,-707.8 -2166.93,-707.8 R3.1@-2164.43,-705.3
NetR4_1: R4.1 U1.23 | length 301.1
  Top Layer w10: R4.1@-2098.57,-255.3 -2014,-255.3 -1999,-240.3 -1999,-110.3 -1981.05,-92.35 U1.23
NetR5_1: R5.1 U1.22 | length 240.5
  Top Layer w10: R5.1@-2098.57,-175.3 -2029,-175.3 -2019,-165.3 -2019,-100.3 -1985.46,-66.76 U1.22
NetR6_2: R6.2 U1.13 | length 218.9
  Top Layer w10: R6.2@-1654.57,190 -1590,190 -1580,180 -1580,98.79 -1592,86.79 U1.13
NetR7_2: R7.2 U1.14 | length 291
  Top Layer w10: R7.2@-1854.57,190 -1854.57,124.57 -1842.38,112.38 U1.14
NetR8_2: R8.2 R10.2 USB2.2 | length 242.6
  Top Layer w10: USB2.2 -2244.24,-35.54 -2224,-15.3 -2169.43,-15.3 R10.2@-2169.43,64.7
NetR9_1: R9.1 U1.16 | length 326.6
  Top Layer w10: R9.1@-2098.57,-95.3 -2049,-95.3 -2044,-90.3 v1(-2044,-50.3) ; v1(-2044,69.7) -2026.91,86.79 -2016.41,86.79 U1.16
  Bottom Layer w10: v1(-2044,-50.3) v1(-2044,69.7)
NetR9_2: R9.2 USB2.3 | length 165.9
  Top Layer w10: USB2.3 -2247.27,-67.03 -2219,-95.3 R9.2@-2169.43,-95.3
NetR10_1: R10.1 U1.15 | length 200.9
  Top Layer w10: R10.1@-2098.57,64.7 -2098.57,105.13 -2091.32,112.38 U1.15
NetR11_2: R11.2 S1.1 | length 101.9
  Bottom Layer w10: S1.1 -1515.43,-404.57 R11.2@-1515.43,-500
NetR14_2: R14.2 S2.1 | length 101.9
  Bottom Layer w10: S2.1 -1515.43,-104.57 R14.2@-1515.43,-200
NetR16_2: R16.2 S3.1 | length 101.9
  Bottom Layer w10: S3.1 -1515.43,195.43 R16.2@-1515.43,100
NetR19_2: R19.2 S4.1 | length 74.6
  Top Layer w10: R19.2@-1120,-424.57 S4.1
PA0: J1.52
PA1: J1.50
PA4: J1.44
PA5: J1.42
PA6: J1.40
PA7: J1.38
PA8: J1.51
PA9: J1.49
PA10: J1.47
PA15: J1.37
PB0: J1.32
PB1: J1.30
PB2: J1.28
PB3: J1.26
PB4: J1.24
PB5: J1.22
PB8: J1.31
PB9: J1.29
PB10: J1.27
PB11: J1.25
PC0: J2.52
PC1: J2.50
PC2: J2.48
PC3: J2.46
PC4: J2.44
PC5: J2.42
PC6: J2.40
PC7: J2.38
PC8: J2.51
PC9: J2.49
PC10: J2.47
PC11: J2.45
PC12: J2.43
PC13: J2.41
PC14: J2.39
PC15: J2.37
PD2: J2.28
PD3: J2.26
PD6: J2.20
PD12: J2.23
PD13: J2.21
PE0: J2.12
PE1: J2.10
PE2: J2.8
PE3: J2.6
PE4: J2.4
PE5: J2.2
PE6: J2.11
RESET: J4.3 S4.2 U3.14 | length 2007.3
  Top Layer w10: S4.2 -1120,-100 -1100,-120 -640,-120 v1(-610,-90) -610,4 -610,122.7 -594.91,137.79 U3.14 ; v1(-1020,-627) v1(-610,-627)
  Bottom Layer w10: J4.3 v1(-1020,-627) ; v1@-610,-627.3 v1(-610,-627) v1(-610,-90)
SWDCLK: J1.39 SWD.9 U3.76 | length 6743.5
  Top Layer w10: SWD.9 -1870,-1027.3 -1870,-947.3 -1850,-927.3 v1(-582,-927.3) 488,-927.3 v1(510,-905.3) ; U3.76 498.28,474.42 v1(510,462.7)
  Bottom Layer w10: J1.39 -582,1384.7 v1(-582,-927.3) ; v1(510,-905.3) v1(510,462.7)
SWDIO: J1.41 SWD.7 U3.72 | length 6461.8
  Top Layer w10: SWD.7 -1970,-1027.3 -1970,-927.3 -1940,-897.3 v1(-682,-897.3) 429,-897.3 v1(450,-876.3) ; U3.72 428.05,334.64 v1(450,312.7)
  Bottom Layer w10: J1.41 -682,1384.7 v1(-682,-897.3) ; v1(450,-876.3) v1(450,312.7)
UART0_RX: J1.18 J5.8 U3.93 | length 1602.7
  Top Layer w10: v1(-282,974) v1(381,974) ; U3.93 v1@-281.49,682 ; J5.8 v1@465.7,1122.7
  Bottom Layer w10: v1(-282,682) v1(-282,974) ; v1@380,975 J5.8 ; v1(463,1123) 480,1140 J1.18
UART0_TX: J1.20 J5.7 U3.92 | length 1489.3
  Top Layer w10: U3.92 -261.8,632.2 -249,645 v1(-249,646) v1@-249,649 ; v1(-249,1009) v1(275,1009) ; v1(280,1174) v1(380,1174) ; J1.20@380,1309 J1.20
  Bottom Layer w10: v1(-249,646) v1(-249,1009) ; v1@280,1014 J5.7 v1(280,1174) ; v1(380,1174) J1.20
UART1_RX: J1.46 J7.6 U1.5 U3.26 | length 4861.8
  Top Layer w10: U1.5 -1580.8,-117.94 -1540,-158.74 -420,-158.74 U3.26 ; v1(-972,1022) -914,1022 -899,1037 1050,1037 1080,1067 J7.6
  Bottom Layer w10: v1(-972.7,-159) -972.7,1270 J1.46
UART1_TX: J1.48 J7.5 U1.1 U3.25 | length 4884
  Top Layer w10: U1.1 -1585.3,-220.3 -1552,-187 v1(-1071,-187) v1(-501,-187) ; v1(-1071,1063) 966,1063 980,1077 J7.5 ; v1(-500,-116) U3.25
  Bottom Layer w10: v1@-1071,-184 -1071,1099 -1070,1272.7 J1.48 ; v1@-500,-186 v1(-500,-116)
USB_DM: J1.45 R2.2 U3.70 | length 5287.8
  Top Layer w10: -2111.57,-625.3 -2093.57,-625.3 -2050.7,-625.3 -2018,-658 -415,-658 v1(-390,-633) ; v1(-390,272.7) -320,272.7 -297.43,295.27 U3.70
  Bottom Layer w10: J1.45 -870,1372.7 v1(-870,-660) ; v1(-390,-633) v1(-390,272.7)
USB_DP: J1.43 R3.2 U3.71 | length 5404.2
  Top Layer w10: -2111.57,-705.3 -2093.57,-705.3 -2047.3,-705.3 -2023,-681 -1300,-681 -1288,-693 -389,-693 v1(-360,-664) ; v1(-360,312.7) -357.74,314.96 U3.71
  Bottom Layer w10: v1(-822,-690) -822,485 -771,536 -771,1373.7 J1.43 ; v1(-360,-664) v1(-360,312.7)
VCC3V3: C9.1 C20.2 C21.2 C22.2 C23.2 D1.1 D2.2 J1.5 J1.6 J1.15 J1.16 J1.35 J1.36 J2.15 J2.16 J2.35 J2.36 J2.55 J2.56 J4.4 LCD.2 R6.1 R7.1 R11.1 R12.1 R13.1 R14.1 R15.1 R16.1 R17.1 R18.1 R19.1 SWD.1 U1.9 U2.2 U3.28 U3.50 U3.75 U3.100 | length 14516.6
  Top Layer w10: C22.2@-451.69,546 -451.69,534.69 -419.28,502.28 U3.100 ; C20.2@-385.31,-236 -385.31,-219.31 -379.91,-213.91 U3.28 ; U3.50 v1(122.84,-159.46) ; U3.75 161.7,393.7 186.69,418.69 C21.2@204,418.69
  Top Layer w20: v1(122.84,-159.46) 135.39,-172 C23.2@195.31,-172
  Top Layer w30: SWD.1 -2320,-1147 -2299.7,-1167.3 -1210,-1167.3 ; C9.1 D2.2@-1822.3,1433.7 ; -2074.57,190 -1925.43,190 -1925.43,234.57 -1906.57,253.43 v1(-1448.43,253.43) ; U2.2 -1846.08,1162.92 -1822,1187 -1822,1319 ; R6.1@-1725.43,190 -1725.43,248 ; D1.1 -1558,1281 -1586,1309 -1812,1309 -1822,1319 ; v1(-1450,-500) R19.1@-1130,-500 ; J2.56 -1220,-1157.3 -1210,-1167.3 ; v1(-1220,-867) -1219.7,-867.3 v1(-940,-867.3) ; J1.35 -420,1500 ; J2.36 -220,-1167.3 ; J1.15 580,1500 ; J2.16 780,-1147.3 760,-1167.3 -220,-1167.3 ; J1.5 1080,1499 ; v1(1475.43,1300) 1475.43,1344.57 1457,1363 1384,1363 1363,1384 1363,1468 1331,1500 580,1500 ; v1(1480,-677.3) LCD.2 ; -1822,1319 D2.2 -1822,1485 -1807,1500 -420,1500 ; -1210,-1167.3 -220,-1167.3 ; -420,1500 580,1500
  Bottom Layer w20: v1(122.84,-159.46) v1@124.39,-161
  Bottom Layer w30: R18.1@-1895,-779.57 -1755,-779.57 -1630,-779.57 -1452.57,-779.57 -1448,-775 ; v1(-1450,-500) -1448.43,-498.43 v1(-1448.43,253.43) ; R11.1@-1448,-500 -1448,-775 ; J2.56 J2.55 v1(-1220,-867) -1422,-867 -1448,-841 -1448,-775 ; v1(-940,-867.3) -920,-847.3 J4.4 ; J1.36 J1.35 ; J2.36 J2.35 ; J1.16 J1.15 ; J2.16 J2.15 ; J1.6 J1.5 ; v1(1475.43,1300) 1480,1295.43 v1(1480,-677.3)
VCC5V: C2.1 C6.2 C7.1 C8.1 D1.2 DC1.1 J1.55 J1.56 J4.5 R1.2 R5.2 U1.19 U1.20 U2.3 USB1.1 USB2.1 | length 4160.4
  Top Layer w10: v1(-2004,9.7) -2003.68,10.01 U1.19 U1.20 -1869.28,-15.58 v1(-1869,-15.3)
  Top Layer w20: USB2.1 -2277.74,-4.04 v1(-2244,29.7) ; USB1.1@-2319,-617.31 -2266.01,-617.31 -2254,-605.3 ; v1@-2244,-532.8 R1.2@-2166.93,-532.8 ; R1.2 -2165,-485 -2150,-470 C6.2
  Top Layer w30: -2254,-605.3 -2244,-595.3 v1@-2244,-532.8 ; DC1.1 -2243,1104.7 -2212,1073.7 C8.1 -1865.7,1073.7 -1814,1022 -1578,1022 -1558,1042 D1.2 -1558,1117 -1420,1255 J1.56 J1.55 ; v1@-2239,-530.3 R1.2 R1.2@-2164.43,-530.3 ; v1@-2239,-175.3 R5.2@-2169.43,-175.3
  Bottom Layer w20: v1(-1869,-15.3) -1779,-15.3 -1769,-25.3 -1769,-115.61
  Bottom Layer w30: DC1.1@-2244,1155 v1(-2244,29.7) -2244,-130.3 ; v1(-2241,-533) -2244,-530 -2244,-340.3 v1(-2244,-170.3) -2244,-130.3 ; v1(-2004,9.7) -2004,-110.3 -2024,-130.3 -2244,-130.3
pads on no net: DC1.2 J1.7 J1.8 J2.22 J4.1 J4.2 J4.8 J5.1 J5.2 J5.3 J5.4 J5.5 J5.6 J6.1 J6.2 J6.3 J6.4 J6.5 J6.6 J6.7 J6.8 J7.1 J7.2 J7.3 J7.4 J7.7 J7.8 J8.1 J8.2 J8.3 J8.4 J8.5 J8.6 J8.7 J8.8 J10.1 J10.2 J10.3 J10.4 J10.5 J10.6 J10.7 J10.8 J10.9 J10.10 J10.11 J10.12 J10.13 J10.14 LCD.3 LCD.16 LCD.18 LCD.19 LCD.20 LCD.29 LCD.30 LCD.31 LCD.32 LCD.33 LCD.34 LCD.35 LCD.36 LCD.37 LCD.38 LCD.39 LCD.40 S1.4 S2.4 S3.4 S4.4 SWD.2 SWD.3 SWD.5 SWD.6 SWD.8 SWD.10 SWD.11 SWD.12 SWD.13 SWD.14 SWD.15 SWD.16 SWD.17 SWD.18 SWD.19 SWD.20 TP1.1 TP2.1 TP3.1 U1.2 U1.3 U1.6 U1.8 U1.10 U1.11 U1.12 U2.4 U3.1 U3.2 U3.3 U3.4 U3.5 U3.6 U3.7 U3.10 U3.11 U3.15 U3.16 U3.17 U3.18 U3.19 U3.20 U3.21 U3.22 U3.23 U3.24 U3.32 U3.33 U3.34 U3.35 U3.36 U3.47 U3.48 U3.59 U3.60 U3.63 U3.64 U3.65 U3.66 U3.67 U3.68 U3.69 U3.73 U3.77 U3.78 U3.79 U3.80 U3.83 U3.84 U3.87 U3.89 U3.90 U3.91 U3.97 U10.1 U10.2 U10.3 U10.4 U10.5 U10.6 U10.7 U10.8 U10.9 U10.10 U10.11 U10.12 U10.13 U10.14 U10.15 U10.16 U10.17 U10.18 U10.19 U10.20 U10.21 U10.22 U10.23 U10.24 U10.25 U10.26 U10.27 U10.28 USB1.4 USB2.4
copper on no net: | length 139.7
  Top Layer w10: v1(-1709,-145.3) -1707.23,-143.53 -1634,-143.53
  Bottom Layer w10: -1769,-154.99 -1718.68,-154.99 v1(-1709,-145.3)

## Keep-outs
Keep-Out Layer:
  lines w5: -2669.61,-1126.51 ccw(c-2590.87,-1126.51) -2590.87,-1205.25 ; -1665.67,-1205.25 1720.94,-1205.25 ccw(c1720.94,-1126.51) 1799.69,-1126.51 1799.69,-752.5 1878.43,-673.76 1878.43,625.46 1799.69,704.2 1799.69,1550.65 -1665.67,1550.65 ; -1665,1550.7 -2590.87,1550.65 ccw(c-2590.87,1471.91) -2669.61,1471.91 -2669.61,-1205.25 -1661,-1205.25 ; 1720.94,1550.65 cw(c1720.94,1471.91) 1799.69,1471.91

## Silkscreen, mask and mechanical layers (free items; w line width, h text height)
Top Overlay:
  circle w5: c480,522.7 r62.99
  circle w5: c480,522.7 r62.99
  lines w5: -1470,1272.7 -1470,1472.7 1330,1472.7 1330,1272.7 -1470,1272.7 ; -1270,-1127.3 -1270,-927.3 1530,-927.3 1530,-1127.3 -1270,-1127.3
  text "SCL1" at -1400,822.7 h40 r90
  text "SDA1" at -1300,822.7 h40 r90
  text "AVDD" at -1200,822.7 h40 r90
  text "GND" at -1100,822.7 h40 r90
  text "SCK/D13" at -1000,822.7 h40 r90
  text "MISO" at -900,822.7 h40 r90
  text "MOSI" at -800,822.7 h40 r90
  text "CS/D10" at -700,822.7 h40 r90
  text "PWM/D9" at -600,822.7 h40 r90
  text "D8" at -500,822.7 h40 r90
  text "D7" at -300,822.7 h40 r90
  text "PWM/D6" at -200,822.7 h40 r90
  text "PWM/D5" at -100,822.7 h40 r90
  text "D4" at 0,822.7 h40 r90
  text "PWM/D3" at 100,822.7 h40 r90
  text "D2" at 200,822.7 h40 r90
  text "TX/D1" at 300,822.7 h40 r90
  text "RX/D0" at 400,822.7 h40 r90
  text "TX3" at 600,822.7 h40 r90
  text "RX3" at 700,822.7 h40 r90
  text "TX2" at 800,822.7 h40 r90
  text "RX2" at 900,822.7 h40 r90
  text "TX1" at 1000,822.7 h40 r90
  text "RX1" at 1100,822.7 h40 r90
  text "SDA" at 1200,822.7 h40 r90
  text "SCL" at 1300,822.7 h40 r90
  text "NUCLEO-STM32F407RE" at 520,652.7 h40
  text "IOREF" at -1100,-697.3 h40 r90
  text "RESET" at -1000,-697.3 h40 r90
  text "3.3V" at -900,-697.3 h40 r90
  text "5V" at -800,-697.3 h40 r90
  text "GND" at -700,-697.3 h40 r90
  text "GND" at -600,-697.3 h40 r90
  text "Vin" at -500,-697.3 h40 r90
  text "A0" at -300,-697.3 h40 r90
  text "A1" at -200,-697.3 h40 r90
  text "A2" at -100,-697.3 h40 r90
  text "A3" at 0,-697.3 h40 r90
  text "A4" at 100,-697.3 h40 r90
  text "A5" at 200,-697.3 h40 r90
  text "A6" at 300,-697.3 h40 r90
  text "A7" at 400,-697.3 h40 r90
  text "A8" at 600,-697.3 h40 r90
  text "A9" at 700,-697.3 h40 r90
  text "A10" at 800,-697.3 h40 r90
  text "A11" at 900,-697.3 h40 r90
  text "DAC0" at 1000,-697.3 h40 r90
  text "DAC1" at 1100,-697.3 h40 r90
  text "CANRX" at 1200,-697.3 h40 r90
  text "CANTX" at 1300,-697.3 h40 r90
Bottom Overlay:
  text "5V" at -1400,1060 h40 r90
  text "GND" at -1300,1060 h40 r90
  text "PA8" at -1200,1060 h40 r90
  text "PA9" at -1100,1060 h40 r90
  text "PA10" at -1000,1060 h40 r90
  text "PA11" at -900,1060 h40 r90
  text "PA12" at -800,1060 h40 r90
  text "PA13" at -700,1060 h40 r90
  text "PA14" at -600,1060 h40 r90
  text "PA15" at -500,1060 h40 r90
  text "3.3V" at -400,1060 h40 r90
  text "GND" at -300,1060 h40 r90
  text "PB8" at -200,1060 h40 r90
  text "PB9" at -100,1060 h40 r90
  text "PB10" at 0,1060 h40 r90
  text "PB11" at 100,1060 h40 r90
  text "PB12" at 200,1060 h40 r90
  text "PB13" at 300,1060 h40 r90
  text "PB14" at 400,1060 h40 r90
  text "PB15" at 500,1060 h40 r90
  text "3.3V" at 600,1060 h40 r90
  text "GND" at 700,1060 h40 r90
  text "PE14" at 800,1060 h40 r90
  text "PE15" at 900,1060 h40 r90
  text "NC" at 1000,1060 h40 r90
  text "3.3V" at 1100,1060 h40 r90
  text "BOOT0" at 1200,1060 h40 r90
  text "GND" at 1300,1060 h40 r90
  text "5V" at -1400,900 h40 r90
  text "GND" at -1300,900 h40 r90
  text "PA0" at -1200,900 h40 r90
  text "PA1" at -1100,900 h40 r90
  text "PA2" at -1000,900 h40 r90
  text "PA3" at -900,900 h40 r90
  text "PA4" at -800,900 h40 r90
  text "PA5" at -700,900 h40 r90
  text "PA6" at -600,900 h40 r90
  text "PA7" at -500,900 h40 r90
  text "3.3V" at -400,900 h40 r90
  text "GND" at -300,900 h40 r90
  text "PB0" at -200,900 h40 r90
  text "PB1" at -100,900 h40 r90
  text "PB2" at 0,900 h40 r90
  text "PB3" at 100,900 h40 r90
  text "PB4" at 200,900 h40 r90
  text "PB5" at 300,900 h40 r90
  text "PB6" at 400,900 h40 r90
  text "PB7" at 500,900 h40 r90
  text "3.3V" at 600,900 h40 r90
  text "GND" at 700,900 h40 r90
  text "PE12" at 800,900 h40 r90
  text "PE13" at 900,900 h40 r90
  text "NC" at 1000,900 h40 r90
  text "3.3V" at 1100,900 h40 r90
  text "GND" at 1300,900 h40 r90
  text "BOOT1" at 1200,860 h40 r90
  text "3.3V" at -1200,-440 h40 r90
  text "GND" at -1100,-440 h40 r90
  text "PC8" at -1000,-440 h40 r90
  text "PC9" at -900,-440 h40 r90
  text "PC10" at -800,-440 h40 r90
  text "PC11" at -700,-440 h40 r90
  text "PC12" at -600,-440 h40 r90
  text "PC13" at -500,-440 h40 r90
  text "PC14" at -400,-440 h40 r90
  text "PC15" at -300,-440 h40 r90
  text "3.3V" at -200,-440 h40 r90
  text "GND" at -100,-440 h40 r90
  text "PD8" at 0,-440 h40 r90
  text "PD9" at 100,-440 h40 r90
  text "PD10" at 200,-440 h40 r90
  text "PD11" at 300,-440 h40 r90
  text "PD12" at 400,-440 h40 r90
  text "PD13" at 500,-440 h40 r90
  text "PD14" at 600,-440 h40 r90
  text "PD15" at 700,-440 h40 r90
  text "3.3V" at 800,-440 h40 r90
  text "GND" at 900,-440 h40 r90
  text "PE5" at 1000,-440 h40 r90
  text "PE6" at 1100,-440 h40 r90
  text "PE8" at 1200,-440 h40 r90
  text "PE9" at 1300,-440 h40 r90
  text "PE10" at 1400,-440 h40 r90
  text "PE11" at 1500,-440 h40 r90
  text "PC6" at -395,-598.3 h40 r90
  text "3.3V" at -1200,-600 h40 r90
  text "GND" at -1100,-600 h40 r90
  text "PC0" at -1000,-600 h40 r90
  text "PC1" at -900,-600 h40 r90
  text "PC2" at -800,-600 h40 r90
  text "PC3" at -700,-600 h40 r90
  text "PC4" at -600,-600 h40 r90
  text "PC5" at -500,-600 h40 r90
  text "PC7" at -300,-600 h40 r90
  text "3.3V" at -200,-600 h40 r90
  text "GND" at -100,-600 h40 r90
  text "PD0" at 0,-600 h40 r90
  text "PD1" at 100,-600 h40 r90
  text "PD2" at 200,-600 h40 r90
  text "PD3" at 300,-600 h40 r90
  text "PD4" at 400,-600 h40 r90
  text "PD5" at 500,-600 h40 r90
  text "PD6" at 600,-600 h40 r90
  text "PD7" at 700,-600 h40 r90
  text "3.3V" at 800,-600 h40 r90
  text "GND" at 900,-600 h40 r90
  text "PE0" at 1000,-600 h40 r90
  text "PE1" at 1100,-600 h40 r90
  text "PE2" at 1200,-600 h40 r90
  text "PE3" at 1300,-600 h40 r90
  text "PE4" at 1400,-600 h40 r90
  text "PE5" at 1500,-600 h40 r90

## Text inside footprints (layer, text, board x,y; h text height)
U2: Top Overlay "LM1117" at -1797.87,1243.87 h40 r270